# Altium PCB STM32F401RCT6开发板-尺寸图.pcbdoc
Units mm, origin at the board's own origin, x right, y up, seen from the top; angles counter-clockwise.
Board outline 52.83 x 24.6 mm, 2 copper layers (Top Layer, Bottom Layer); 12 components, 0 nets, 144 pads, 0 vias.
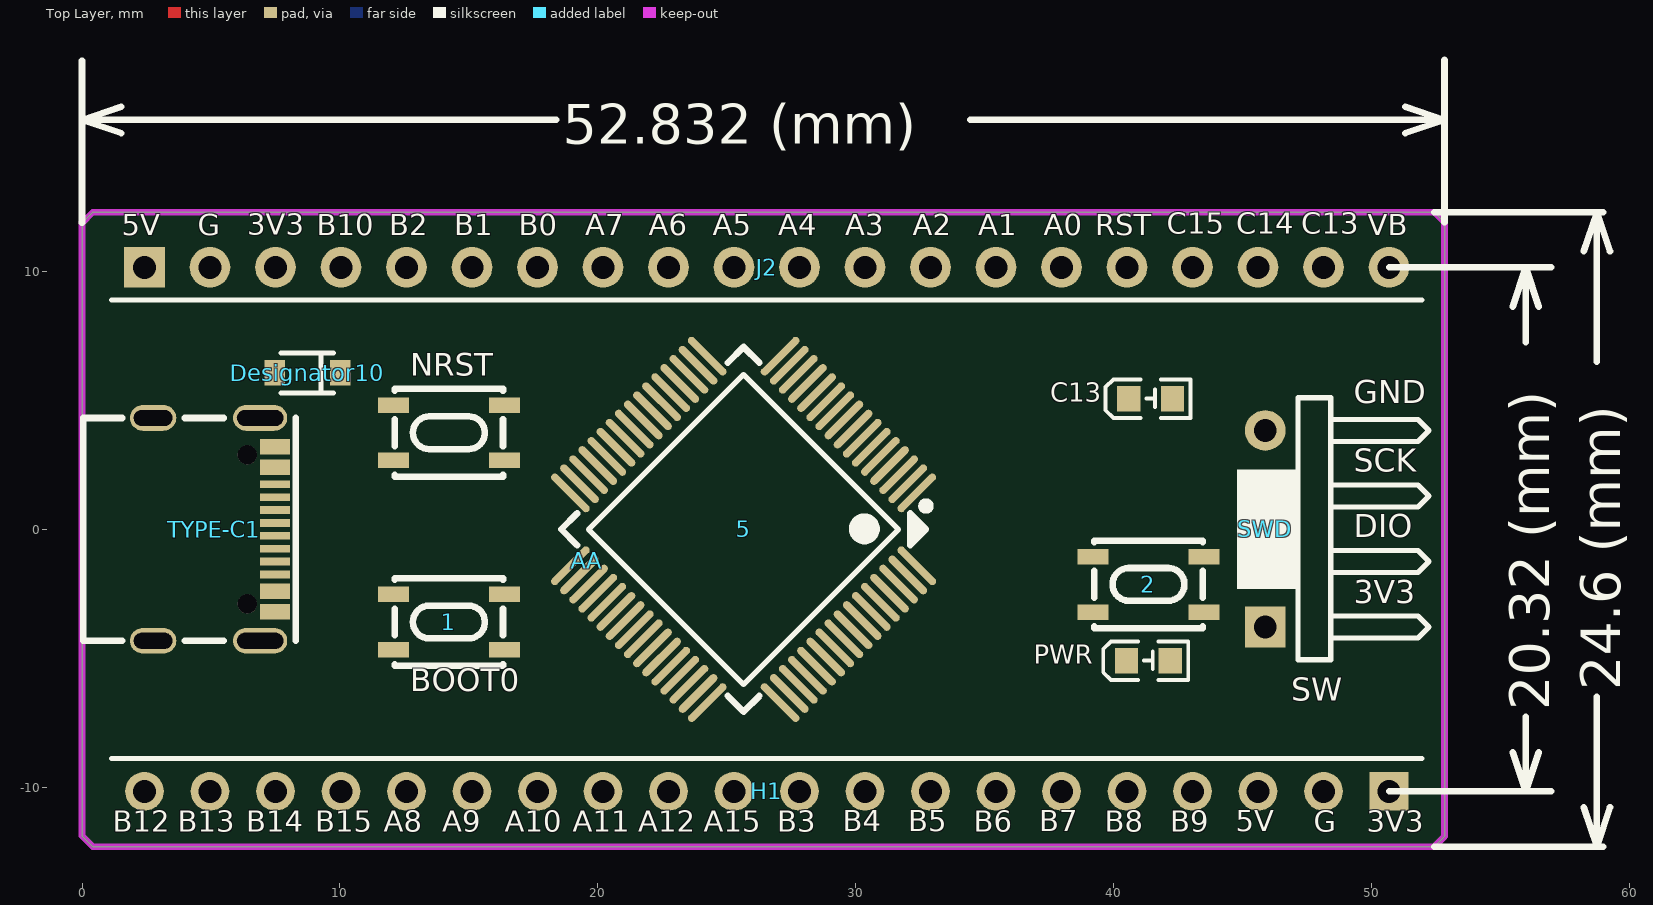
[diagram p0: Top Layer view]
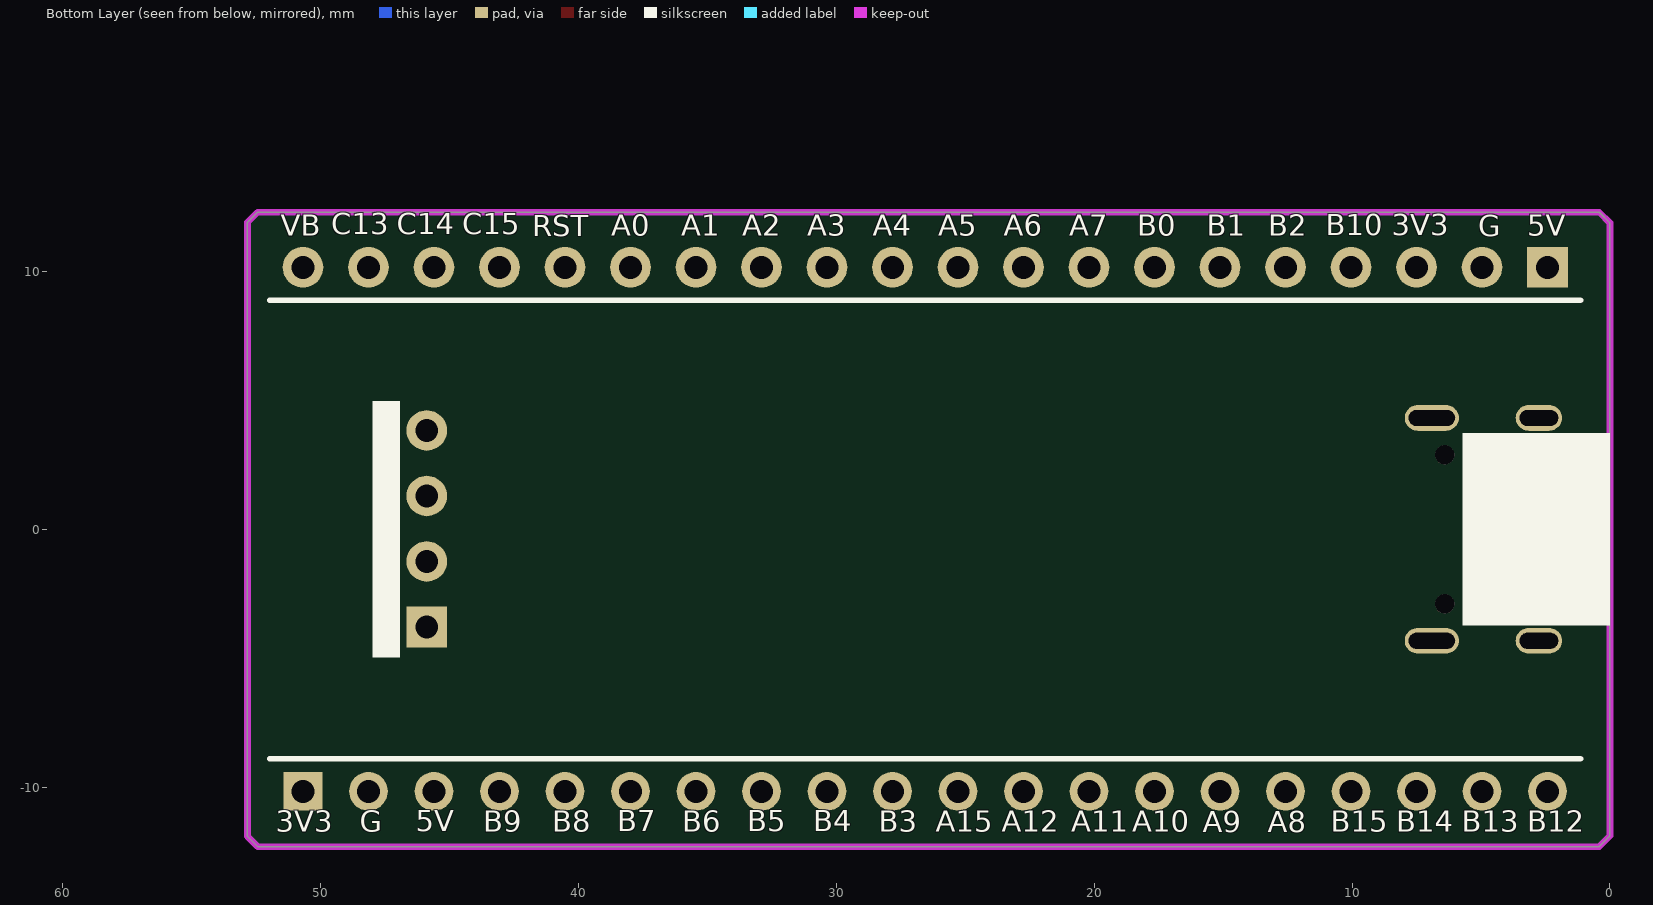
[diagram p1: Bottom Layer view, seen from below]

## Layer stack, top to bottom
Top Solder: solder mask 0.0102, Solder Resist, Dk 3.5
Top Layer: signal copper 0.0356
Dielectric1: dielectric 0.32, FR-4, Dk 4.8
Bottom Layer: signal copper 0.0356
Bottom Solder: solder mask 0.0102, Solder Resist, Dk 3.5

## Board outline
0,-11.882 0,11.882 0.418,12.3 52.44,12.3 52.832,11.908 52.832,-11.908 52.44,-12.3 0.418,-12.3

## Design rules (kind name [scope] priority, off if disabled: settings)
Clearance [All] p1: gap=0.178
PlaneConnect [All] p1: planeconnectstyle=Direct reliefexpansion=0.508 reliefentries=4 reliefconductorwidth=0.254 reliefairgap=0.254
PolygonConnect [All] p1: connectstyle=Direct reliefconductorwidth=0.254 reliefentries=4 polygonreliefangle="90 Angle" airgapwidth=0.254
RoutingVias [All] p1: holewidth=0.711 width=1.27 viastyle="Through Hole" minholewidth=0.711 minwidth=1.27 maxholewidth=0.711 maxwidth=1.27
SolderMaskExpansion [All] p1: expansion=0.102
Width [All] p1: maxlimit=0.6 minlimit=0.1 preferedwidth=0.254
29 further rules are at their usual default settings.

## Components (designator, comment, footprint, x,y, rotation, side; value= is the part's Value field where it differs from the comment)
1 "SW-SMD_4P-L4.2-W3.4-P2.15-LS5.2" SW-SMD_4P-L4.2-W3.4-P2.15-LS5.2 14.224,-3.594 r180 top
2 "SW-SMD_4P-L4.2-W3.4-P2.15-LS5.2" SW-SMD_4P-L4.2-W3.4-P2.15-LS5.2 41.351,-2.134 r180 top
5 "LQFP-64_L10.0-W10.0-P0.50-LS12.0-BL" LQFP-64_L10.0-W10.0-P0.50-LS12.0-BL 25.654,0 r135 top locked
AA "Comment" "STM32F4x1CxU6 WeActStudio" 19.566,-1.219 r0 top
C13 "LED-0603_R" LED-0603 42.256,5.08 r180 top (schematic designator PC13)
Designator10 "Comment" SOD-323(0805) 8.738,6.071 r0 top
H1 "Comment" HDR1X20 50.681,-10.16 r180 top locked
J2 "HDR-M-2.54_1x20" HDR-M-2.54_1X20 26.551,10.16 r180 top
PWR "LED-0603_G" LED-0603 42.164,-5.08 r180 top
SWD "HDR-M-2.54_1x4" HDR-M-2.54_1X4 45.88,0.025 r90 top locked
TYPE-C1 "USB" USB3.0-TYPE-C-SMD_16PIN-H-PITCH0.50 5.12,0 r270 top locked
? "SW-SMD_4P-L4.2-W3.4-P2.15-LS5.2" SW-SMD_4P-L4.2-W3.4-P2.15-LS5.2 14.224,3.746 r180 top

## Footprints (in the part's own frame and the unit in brackets; to place one, negate y for a bottom-side part, rotate by r counter-clockwise, add the part's x,y. Pads: shape width x height; smd on the part's side, far side on the other; paste and mask are expansions set on the pad)
HDR1X20 [mm] "Connector; Header; 20 Position"
  rect 1.5x1.5 hole 0.9: 1(0,0)
  round 1.5 hole 0.9: 2(2.54,0) 3(5.08,0) 4(7.62,0) 5(10.16,0) 6(12.7,0) 7(15.24,0) 8(17.78,0) 9(20.32,0) 10(22.86,0) 11(25.4,0) 12(27.94,0) 13(30.48,0) 14(33.02,0) 15(35.56,0) 16(38.1,0) 17(40.64,0) 18(43.18,0) 19(45.72,0) 20(48.26,0)
  silkscreen extent -1.27,-1.27 49.53,-1.27
HDR-M-2.54_1X4 [mil]
  rect 62x62 hole 35 paste+0 mask+4: 1(-150,0)
  round 62 hole 35 paste+0 mask+4: 2(-50,0) 3(50,0) 4(150,0)
HDR-M-2.54_1X20 [mil]
  rect 62x62 hole 35 paste+0 mask+4: 1(950,0)
  round 62 hole 35 paste+0 mask+4: 2(850,0) 3(750,0) 4(650,0) 5(550,0) 6(450,0) 7(350,0) 8(250,0) 9(150,0) 10(50,0) 11(-50,0) 12(-150,0) 13(-250,0) 14(-350,0) 15(-450,0) 16(-550,0) 17(-650,0) 18(-750,0) 19(-850,0) 20(-950,0)
  silkscreen extent -1000,50 1000,50
LED-0603 [mm]
  rect 0.9x1 smd: 1(-0.033,0.013) 2(1.667,0.013)
  silkscreen extent -0.73,-0.74 2.57,0.76
LQFP-64_L10.0-W10.0-P0.50-LS12.0-BL [mm]
  oval 0.3x2 smd paste+0 mask+0.102: 1(-3.75,-5.75) 2(-3.25,-5.75) 3(-2.75,-5.75) 4(-2.25,-5.75) 5(-1.75,-5.75) 6(-1.25,-5.75) 7(-0.75,-5.75) 8(-0.25,-5.75) 9(0.25,-5.75) 10(0.75,-5.75) 11(1.25,-5.75) 12(1.75,-5.75) 13(2.25,-5.75) 14(2.75,-5.75) 15(3.25,-5.75) 16(3.75,-5.75) 33(3.75,5.75) 34(3.25,5.75) 35(2.75,5.75) 36(2.25,5.75) 37(1.75,5.75) 38(1.25,5.75) 39(0.75,5.75) 40(0.25,5.75) 41(-0.25,5.75) 42(-0.75,5.75) 43(-1.25,5.75) 44(-1.75,5.75) 45(-2.25,5.75) 46(-2.75,5.75) 47(-3.25,5.75) 48(-3.75,5.75)
  oval 2x0.3 smd paste+0 mask+0.102: 17(5.75,-3.75) 18(5.75,-3.25) 19(5.75,-2.75) 20(5.75,-2.25) 21(5.75,-1.75) 22(5.75,-1.25) 23(5.75,-0.75) 24(5.75,-0.25) 25(5.75,0.25) 26(5.75,0.75) 27(5.75,1.25) 28(5.75,1.75) 29(5.75,2.25) 30(5.75,2.75) 31(5.75,3.25) 32(5.75,3.75) 49(-5.75,3.75) 50(-5.75,3.25) 51(-5.75,2.75) 52(-5.75,2.25) 53(-5.75,1.75) 54(-5.75,1.25) 55(-5.75,0.75) 56(-5.75,0.25) 57(-5.75,-0.25) 58(-5.75,-0.75) 59(-5.75,-1.25) 60(-5.75,-1.75) 61(-5.75,-2.25) 62(-5.75,-2.75) 63(-5.75,-3.25) 64(-5.75,-3.75)
  silkscreen extent -5,-5.79 5,5
SOD-323(0805) [mm]
  rect 0.8x1 smd: 1(-1.27,0) 2(1.27,0)
  silkscreen extent -1.02,-0.79 1.02,0.76
"STM32F4x1CxU6 WeActStudio" [mm]
  silkscreen extent 27.58,-3.84 32.66,6.32
SW-SMD_4P-L4.2-W3.4-P2.15-LS5.2 [mm]
  rect 1.2x0.6 smd paste+0 mask+0.102: 1(-2.15,1.075) 2(2.15,1.075) 3(-2.15,-1.075) 4(2.15,-1.075)
  silkscreen extent -2.1,-1.7 2.1,1.7
USB3.0-TYPE-C-SMD_16PIN-H-PITCH0.50 [mm]
  oval 1x2.099 hole 0.61 slot 1.8 at 90 deg: 1(-4.32,1.787) 2(4.32,1.787)
  oval 1x1.799 hole 0.61 slot 1.5 at 90 deg: 3(-4.32,-2.363) 4(4.32,-2.363)
  rect 0.6x1.15 smd: A1B12(-3.2,2.363) A4B9(-2.4,2.363) B1A12(3.2,2.363) B4A9(2.4,2.363)
  rect 0.3x1.15 smd: A5(-1.25,2.363) A6(-0.25,2.363) A7(0.25,2.363) A8(-1.75,2.363) B5(1.75,2.363) B6(0.75,2.363) B7(-0.75,2.363) B8(1.25,2.363)
  round 0.75 hole 0.75 unplated: ""(-2.89,1.288) ""(2.89,1.288)
  silkscreen extent -4.32,-5.08 4.32,3.18

## Part data
TYPE-C1: library part type-c-16p

## Nets (pads, with @x,y where several pads share a name; then routed paths per layer and width w, separated by ;. In a path a pad name is that pad's centre, name@x,y a point inside that pad or via, vN(x,y) a via of type N, cw(c..) or ccw(c..) an arc to the next point about the centre after c; other vN are vias at no path point)
pads on no net: 1.1 1.2 1.3 1.4 2.1 2.2 2.3 2.4 5.1 5.2 5.3 5.4 5.5 5.6 5.7 5.8 5.9 5.10 5.11 5.12 5.13 5.14 5.15 5.16 5.17 5.18 5.19 5.20 5.21 5.22 5.23 5.24 5.25 5.26 5.27 5.28 5.29 5.30 5.31 5.32 5.33 5.34 5.35 5.36 5.37 5.38 5.39 5.40 5.41 5.42 5.43 5.44 5.45 5.46 5.47 5.48 5.49 5.50 5.51 5.52 5.53 5.54 5.55 5.56 5.57 5.58 5.59 5.60 5.61 5.62 5.63 5.64 ?.1 ?.2 ?.3 ?.4 C13.1 C13.2 Designator10.1 Designator10.2 H1.1 H1.2 H1.3 H1.4 H1.5 H1.6 H1.7 H1.8 H1.9 H1.10 H1.11 H1.12 H1.13 H1.14 H1.15 H1.16 H1.17 H1.18 H1.19 H1.20 J2.1 J2.2 J2.3 J2.4 J2.5 J2.6 J2.7 J2.8 J2.9 J2.10 J2.11 J2.12 J2.13 J2.14 J2.15 J2.16 J2.17 J2.18 J2.19 J2.20 PWR.1 PWR.2 SWD.1 SWD.2 SWD.3 SWD.4 TYPE-C1. TYPE-C1.1 TYPE-C1.2 TYPE-C1.3 TYPE-C1.4 TYPE-C1.A1B12 TYPE-C1.A4B9 TYPE-C1.A5 TYPE-C1.A6 TYPE-C1.A7 TYPE-C1.A8 TYPE-C1.B1A12 TYPE-C1.B4A9 TYPE-C1.B5 TYPE-C1.B6 TYPE-C1.B7 TYPE-C1.B8

## Keep-outs
Keep-Out Layer:
  the board outline again, w0.254

## Silkscreen, mask and mechanical layers (free items; w line width, h text height)
Top Overlay:
  rectangle: 44.78,-2.311 47.092,2.311
  lines w0.254: 0,11.882 0,18.174 ; 0,15.621 0,16.129 ; 1.524,15.367 0,15.875 ; 1.524,16.383 0,15.875 ; 18.392,15.875 0,15.875 ; 34.44,15.875 52.832,15.875 ; 50.681,-10.16 56.972,-10.16 ; 50.681,10.16 56.972,10.16 ; 51.308,15.367 52.832,15.875 ; 51.308,16.383 52.832,15.875 ; 52.44,-12.3 58.731,-12.3 ; 52.44,12.3 58.731,12.3 ; 52.832,11.908 52.832,18.199 ; 52.832,15.621 52.832,16.129 ; 55.474,-8.636 55.982,-10.16 ; 55.474,8.636 55.982,10.16 ; 55.728,-10.16 56.236,-10.16 ; 55.728,10.16 56.236,10.16 ; 55.982,-7.262 55.982,-10.16 ; 55.982,7.262 55.982,10.16 ; 56.49,-8.636 55.982,-10.16 ; 56.49,8.636 55.982,10.16 ; 58.232,-10.776 58.74,-12.3 ; 58.232,10.776 58.74,12.3 ; 58.486,-12.3 58.994,-12.3 ; 58.486,12.3 58.994,12.3 ; 58.74,-6.5 58.74,-12.3 ; 58.74,6.5 58.74,12.3 ; 59.248,-10.776 58.74,-12.3 ; 59.248,10.776 58.74,12.3
  text "52.832 (mm)" at 18.646,14.961 h1.52
  text "C15" at 42.062,11.19 h1.4
  text "C14" at 44.755,11.19 h1.4
  text "C13" at 47.269,11.19 h1.4
  text "3V3" at 6.401,11.151 h1.4
  text "5V" at 1.549,11.142 h1.4
  text "G" at 4.496,11.125 h1.4
  text "B10" at 9.093,11.138 h1.4
  text "B2" at 11.913,11.138 h1.4
  text "B1" at 14.427,11.138 h1.4
  text "B0" at 16.942,11.138 h1.4
  text "A7" at 19.507,11.142 h1.4
  text "A6" at 21.971,11.138 h1.4
  text "A5" at 24.46,11.142 h1.4
  text "A4" at 27,11.142 h1.4
  text "A3" at 29.591,11.138 h1.4
  text "A2" at 32.207,11.138 h1.4
  text "A1" at 34.747,11.138 h1.4
  text "A0" at 37.287,11.138 h1.4
  text "RST" at 39.294,11.125 h1.4
  text "VB" at 49.86,11.142 h1.4
  text "NRST" at 12.725,5.664 h1.5
  text "24.6 (mm)" at 59.654,-6.246 h1.52 r90
  text "BOOT0" at 12.725,-6.566 h1.5
  text "20.32 (mm)" at 56.896,-7.008 h1.52 r90
  text "B12" at 1.194,-11.989 h1.4
  text "B13" at 3.708,-11.989 h1.4
  text "B14" at 6.375,-11.989 h1.4
  text "B15" at 9.042,-11.989 h1.4
  text "A8" at 11.709,-11.989 h1.4
  text "A9" at 13.965,-11.989 h1.4
  text "A10" at 16.389,-11.989 h1.4
  text "A11" at 19.029,-11.989 h1.4
  text "A12" at 21.569,-11.989 h1.4
  text "A15" at 24.109,-11.989 h1.4
  text "B3" at 26.949,-11.989 h1.4
  text "B4" at 29.489,-11.985 h1.4
  text "B5" at 32.029,-11.985 h1.4
  text "B6" at 34.569,-11.989 h1.4
  text "B7" at 37.109,-11.985 h1.4
  text "B8" at 39.649,-11.989 h1.4
  text "B9" at 42.189,-11.989 h1.4
  text "5V" at 44.729,-11.985 h1.4
  text "3V3" at 49.809,-11.989 h1.4
  text "G" at 47.769,-12 h1.4
Bottom Overlay:
  rectangle: 46.914,-4.978 47.981,4.978
  rectangle: 0,-3.734 5.715,3.734
  lines w0.22: 1.143,-8.89 51.968,-8.89 ; 1.143,8.89 51.968,8.89
  text "C15" at 44.512,11.164 h1.4
  text "C14" at 47.038,11.164 h1.4
  text "C13" at 49.579,11.164 h1.4
  text "3V3" at 8.458,11.125 h1.4
  text "B10" at 11.024,11.125 h1.4
  text "5V" at 3.207,11.116 h1.4
  text "G" at 5.104,11.1 h1.4
  text "B2" at 13.259,11.112 h1.4
  text "B1" at 15.631,11.112 h1.4
  text "B0" at 18.339,11.112 h1.4
  text "A7" at 20.972,11.116 h1.4
  text "A6" at 23.508,11.112 h1.4
  text "A5" at 26.052,11.116 h1.4
  text "A4" at 28.578,11.116 h1.4
  text "A3" at 31.119,11.112 h1.4
  text "A2" at 33.647,11.112 h1.4
  text "A1" at 36.019,11.112 h1.4
  text "A0" at 38.727,11.112 h1.4
  text "RST" at 41.783,11.1 h1.4
  text "VB" at 51.537,11.116 h1.4
  text "B12" at 3.2,-11.989 h1.4
  text "B13" at 5.746,-11.989 h1.4
  text "B14" at 8.279,-11.989 h1.4
  text "B15" at 10.826,-11.989 h1.4
  text "A10" at 18.521,-11.989 h1.4
  text "A11" at 20.887,-11.989 h1.4
  text "A12" at 23.588,-11.989 h1.4
  text "A15" at 26.141,-11.989 h1.4
  text "B3" at 28.363,-11.989 h1.4
  text "B4" at 30.896,-11.985 h1.4
  text "B5" at 33.444,-11.985 h1.4
  text "B6" at 35.974,-11.989 h1.4
  text "B7" at 38.485,-11.985 h1.4
  text "B8" at 41.023,-11.989 h1.4
  text "B9" at 43.687,-11.989 h1.4
  text "5V" at 46.31,-11.985 h1.4
  text "3V3" at 51.727,-11.989 h1.4
  text "A8" at 13.262,-12.014 h1.4
  text "A9" at 15.799,-12.014 h1.4
  text "G" at 48.486,-12 h1.4

## Text inside footprints (layer, text, board x,y; h text height)
AA: Top Overlay "3V3" at 49.309,-3.15 h1.52; Top Overlay "DIO" at 49.309,-0.593 h1.52; Top Overlay "SW" at 46.888,-6.934 h1.52; Top Overlay "SCK" at 49.309,1.939 h1.52; Top Overlay "GND" at 49.309,4.597 h1.52